# Altium PCB Si1153 Eval PCB1.PcbDoc
Units mm, origin at the board's own origin, x right, y up, seen from the top; angles counter-clockwise.
Board outline 42.5 x 12.8 mm, 2 copper layers (Top Layer, Bottom Layer); 18 components, 10 nets, 48 pads, 10 vias.
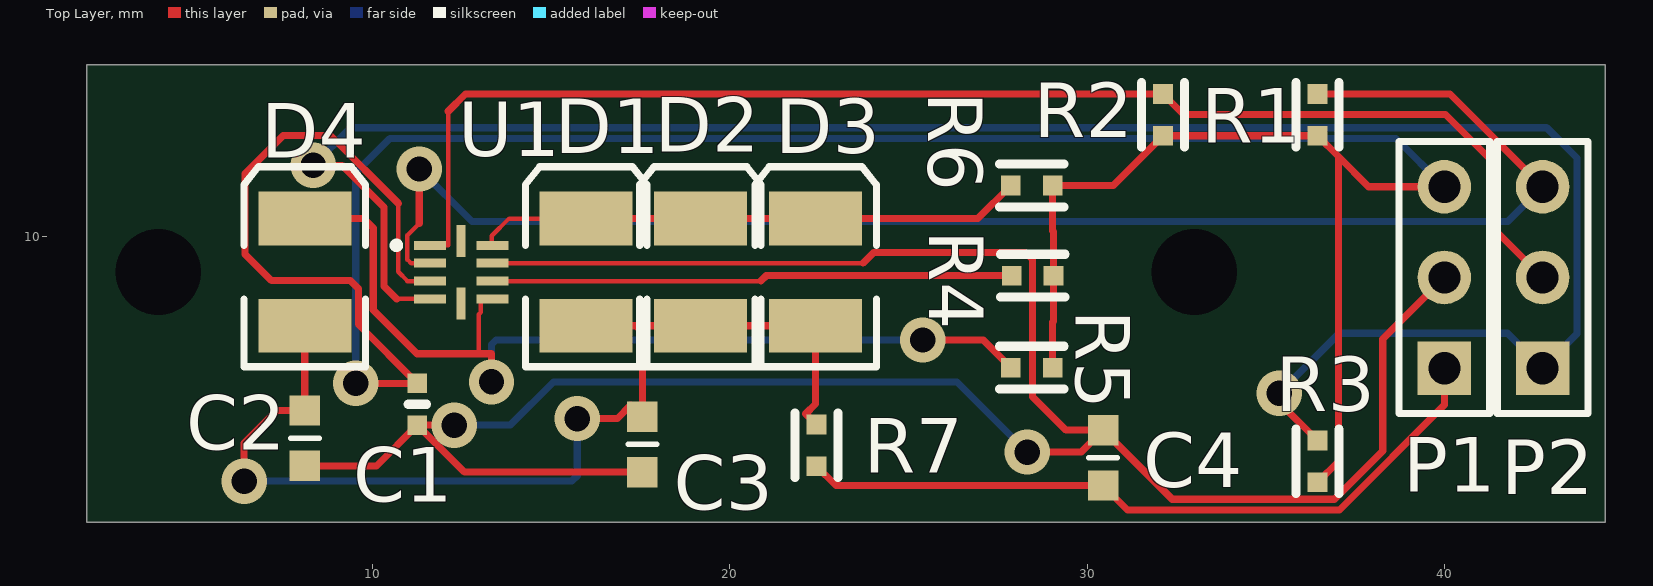
[diagram p0: Top Layer view]
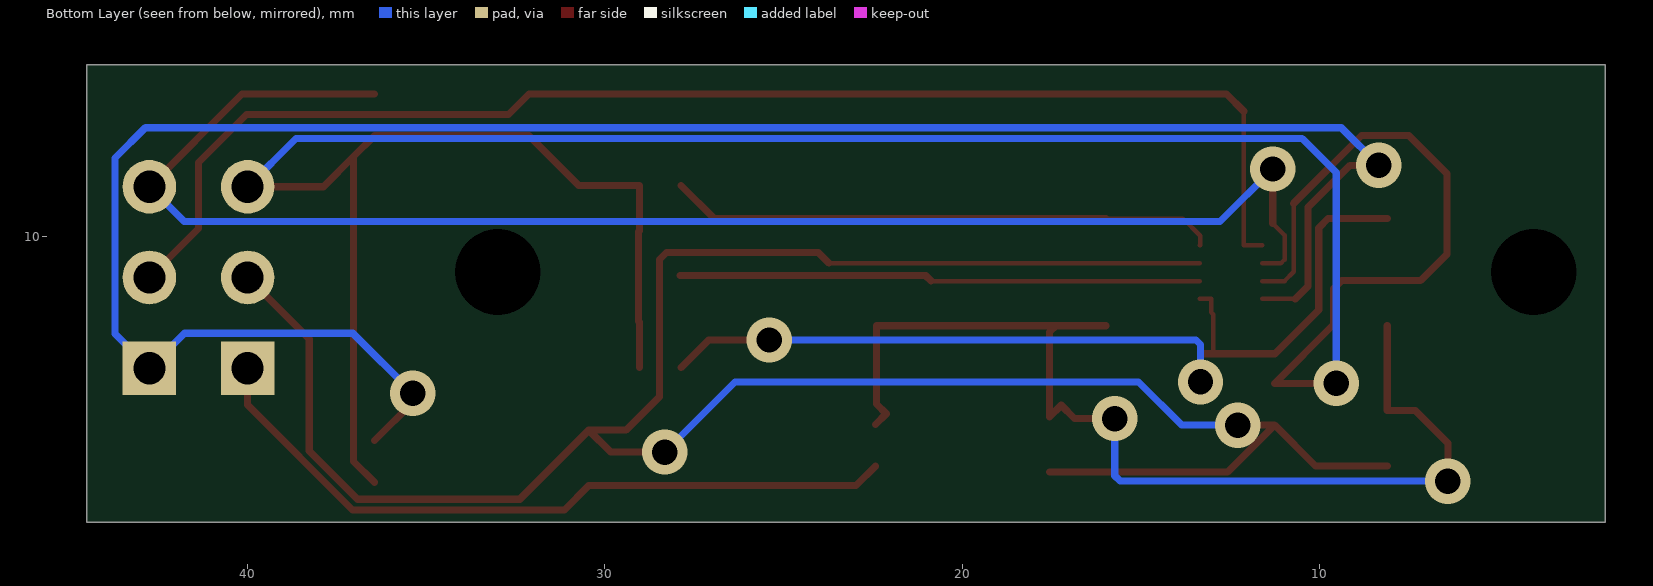
[diagram p1: Bottom Layer view, seen from below]
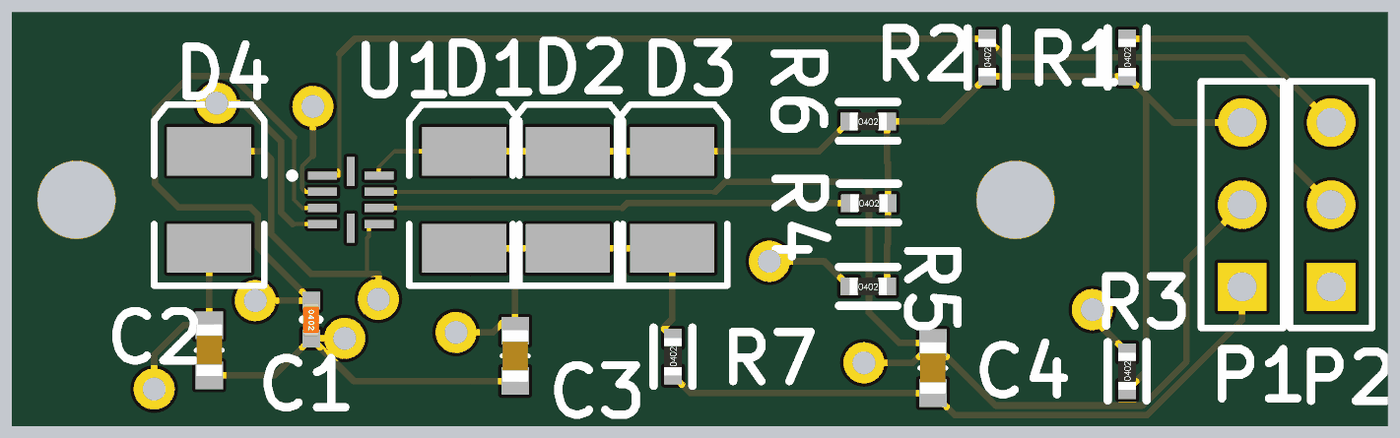
[diagram p2: 3D render of the assembled board from above, using the file's embedded part models]

## Layer stack, top to bottom
Top Solder: solder mask 0.0102, Solder Resist, Dk 3.5
Top Layer: signal copper 0.0356
Dielectric 1: dielectric 0.32, FR-4, Dk 4.8
Bottom Layer: signal copper 0.0356
Bottom Solder: solder mask 0.0102, Solder Resist, Dk 3.5

## Board outline
2,2 44.5,2 44.5,14.8 2,14.8

## Design rules (kind name [scope] priority, off if disabled: settings)
Clearance [All] p1: gap=0.1 ignorepadtopadclearanceinfootprint=FALSE except(0: Arc-Hole Track-Hole SMDPad-Hole THPad-Hole Via-Hole Fill-Hole Poly-Hole Region-Hole Text-Hole)
PolygonConnect [All] p1: connectstyle=Relief reliefconductorwidth=0.254 reliefentries=4 polygonreliefangle="90 Angle" airgapwidth=0.254
RoomDefinition Sheet1 [InComponentClass('Sheet1')] p1: confinementstyle=ConfineIn formatcopy=TRUE lockcomponents=FALSE outline 155.534,3.426 252.888,3.426 252.888,10.052 155.534,10.052
RoutingVias [All] p1: holewidth=0.711 width=1.27 viastyle="Through Hole" minholewidth=0.711 minwidth=1.27 maxholewidth=0.711 maxwidth=1.27
SMDNeckDown [All] p1: percent=50.000
SolderMaskExpansion [All] p1: expansion=0.102
Width [All] p1: maxlimit=0.254 minlimit=0.1 preferedwidth=0.2 minimp=50.000000 maximp=50.000000 favimp=50.000000
30 further rules are at their usual default settings.

## Classes and differential pairs
component class Sheet1: C1 C2 C3 C4 D2 D3 D4 P1 P2 R1 R2 R3 R4 R5 R6 R7 U1

## Components (designator, comment, footprint, x,y, rotation, side; value= is the part's Value field where it differs from the comment)
C1 "0.10µF" SMD-0402C 11.25,5.3 r180 top
C2 "47µF" SMD-0603C 8.1,4.35 r0 top
C3 "47µF" SMD-0603C 17.55,4.175 r0 top
C4 "47µF" SMD-0603C 30.45,3.8 r180 top
D1 "LED1" 3.5X2.8X1.9 15.975,9 r90 top
D2 "LED2" 3.5X2.8X1.9 19.175,9 r90 top
D3 "LED3" 3.5X2.8X1.9 22.4,9 r90 top
D4 "LED4" 3.5X2.8X1.9 8.1,9 r90 top
P1 "Header 3" HDR1X3 40,6.31 r90 top
P2 "Header 3" HDR1X3 42.75,6.31 r90 top
R1 "5.1k" SMD-0402-RES 36.45,13.4 r0 top
R2 "5.1k" SMD-0402-RES 32.125,13.4 r0 top
R3 "5.1k" SMD-0402-RES 36.45,3.7 r0 top
R4 "47k" SMD-0402-RES 28.475,8.9 r270 top
R5 "47k" SMD-0402-RES 28.45,6.325 r270 top
R6 "47k" SMD-0402-RES 28.45,11.425 r270 top
R7 "22" SMD-0402-RES 22.425,4.15 r0 top
U1 "Si1153-A10-DFN-10" SLAB-QFN-10_V 12.475,9 r0 top

## Footprints (in the part's own frame and the unit in brackets; to place one, negate y for a bottom-side part, rotate by r counter-clockwise, add the part's x,y. Pads: shape width x height; smd on the part's side, far side on the other; paste and mask are expansions set on the pad)
3.5X2.8X1.9 [mm] "SM LED; 2 C-Bend Leads; Body 3.5 x 2.8 x 1.9 mm, inc leads (LxWxH typ)"
  rect 1.5x2.6 smd: 1(-1.5,0) 2(1.5,0)
  silkscreen extent -2.65,-1.7 2.95,1.7
HDR1X3 [mm] "Connector; Header; 3 Position"
  rect 1.5x1.5 hole 0.9: 1(0,0)
  round 1.5 hole 0.9: 2(2.54,0) 3(5.08,0)
  silkscreen extent -1.27,-1.27 6.35,1.27
SLAB-QFN-10_V [mm] "QFN, 10-Leads, Body 2x2mm, Pitch 0.5mm"
  rect 0.9x0.25 smd: 1(-0.875,0.75) 2(-0.875,0.25) 3(-0.875,-0.25) 4(-0.875,-0.75) 6(0.875,-0.75) 7(0.875,-0.25) 8(0.875,0.25) 9(0.875,0.75)
  rect 0.25x0.9 smd: 5(0,-0.875) 10(0,0.875)
  silkscreen extent -1.87,0.69 -1.75,0.81, body extent -1,-1 1,1, height 0.8
SMD-0402-RES [mm]
  rect 0.55x0.55 smd: 1(0,0.584) 2(0,-0.584)
  silkscreen extent -0.6,-0.9 0.6,0.9, body extent -0.28,-0.57 0.27,0.58, height 0.41
SMD-0402C [mm]
  rect 0.55x0.55 smd: 1(0,0.584) 2(0,-0.584)
  silkscreen extent -0.25,0 0.25,0, body extent -0.25,-0.51 0.25,0.51, height 0.51
SMD-0603C [mm]
  rect 0.85x0.85 smd: 1(0,0.775) 2(0,-0.775)
  silkscreen extent -0.4,0 0.4,0, body extent -0.4,-0.8 0.4,0.8, height 0.9

## Part data
C1: library part GCM155R71C104KA55D, "CAP CER 0.1UF 16V X7R 0402", Digi-Key Part Number=490-4759-1-ND, Manufacturer="Murata Electronics North America", Operating Temperature="-55°C ~ 125°C", Package / Case="0402 (1005 Metric)", Ratings=AEC-Q200, Temperature Coefficient=X7R, Tolerance=±10%, Voltage=16V, @ qty=0, Applications=Automotive, Datasheets=http://www.murata.com/~/media/webrenewal/support/library/catalog/products/capacitor/mlcc/c03e.ashx, Factory Stock=0, Features=-, Height - Seated (Max)=-, Image=//media.digikey.com/Renders/Murata%20Renders/ZRB-SERIES-0402.jpg, Lead Spacing=-, Lead Style=-, Minimum Quantity=1, Mounting Type="Surface Mount, MLCC", Packaging="Cut Tape (CT)", Part Number=GCM155R71C104KA55D, Part Status=Active, Quantity Available=734194, Series=GCM, Size / Dimension="0.039\" L x 0.020\" W (1.00mm x 0.50mm)", Thickness (Max)="0.022\" (0.55mm)", Unit Price (USD)=0.1
C2 C3 C4: library part ZRB18AR60J476ME01L, "CAP CER 47UF 6.3V X5R 0603", Digi-Key Part Number=490-13255-1-ND, Manufacturer="Murata Electronics North America", Operating Temperature="-55°C ~ 85°C", Package / Case="0603 (1608 Metric)", Ratings=-, Temperature Coefficient=X5R, Tolerance=±20%, Voltage=6.3V, @ qty=0, Applications="Acoustic Noise Reduction", Datasheets=http://psearch.en.murata.com/capacitor/product/ZRB18AR60J476ME01%23.pdf, Factory Stock=0, Features="Derating Recommended, Interposer Termination", Height - Seated (Max)=-, Image=//media.digikey.com/Renders/Murata%20Renders/ZRB-SERIES-0603.jpg, Lead Spacing=-, Lead Style=-, Minimum Quantity=1, Mounting Type="Surface Mount, MLCC", Packaging="Cut Tape (CT)", Part Number=ZRB18AR60J476ME01L, Part Status=Active, Quantity Available=4130, Series=ZRB, Size / Dimension="0.063\" L x 0.031\" W (1.60mm x 0.80mm)", Thickness (Max)="0.047\" (1.20mm)", Unit Price (USD)=0.62
D1 D2 D4: library part LED3, "Typical BLUE SiC LED", DatasheetVersion=16-Apr-2002, LatestRevisionDate=17-Dec-2003, LatestRevisionNote="PCB Footprint replaced.", PackageDescription="SM LED; 2 C-Bend Leads; Body 3.5 x 2.8 x 1.9 mm, inc leads (LxWxH typ)", PackageReference=3.5X2.8X1.9, PackageVersion=16-Apr-2002, Published=8-Jun-2000, Publisher="Altium Limited"
D3: "Typical BLUE SiC LED", DatasheetVersion=16-Apr-2002, LatestRevisionDate=17-Dec-2003, LatestRevisionNote="PCB Footprint replaced.", PackageDescription="SM LED; 2 C-Bend Leads; Body 3.5 x 2.8 x 1.9 mm, inc leads (LxWxH typ)", PackageReference=3.5X2.8X1.9, PackageVersion=16-Apr-2002, Published=8-Jun-2000, Publisher="Altium Limited"
P1 P2: "Header, 3-Pin", LatestRevisionDate=17-Jul-2002, LatestRevisionNote="Re-released for DXP Platform.", Publisher="Altium Limited"
R1 R2 R3: library part ERJ-2GEJ512X, "RES SMD 5.1K OHM 5% 1/10W 0402", Digi-Key Part Number=P5.1KJCT-ND, Manufacturer="Panasonic Electronic Components", Operating Temperature="-55°C ~ 155°C", Package / Case="0402 (1005 Metric)", Power (Watts)="0.1W, 1/10W", Supplier Device Package=0402, Temperature Coefficient=±200ppm/°C, Tolerance=±5%, @ qty=1500, Composition="Thick Film", Datasheets=http://industrial.panasonic.com/www-cgi/jvcr13pz.cgi?E+PZ+3+AOA0001+ERJ2GEJ512X+7+WW, Factory Stock=0, Failure Rate=-, Features="Automotive AEC-Q200", Height - Seated (Max)="0.016\" (0.40mm)", Image=//media.digikey.com/Photos/Panasonic%20Photos/ERJ-PA2-Series.jpg, Minimum Quantity=1, Number of Terminations=2, Packaging="Cut Tape (CT)", Part Number=ERJ-2GEJ512X, Part Status=Active, Quantity Available=153265, Series=ERJ, Size / Dimension="0.039\" L x 0.020\" W (1.00mm x 0.50mm)", Unit Price (USD)=0.00350
R4 R5 R6: library part ERJ-2GEJ473X, "RES SMD 47K OHM 5% 1/10W 0402", Digi-Key Part Number=P47KJCT-ND, Manufacturer="Panasonic Electronic Components", Operating Temperature="-55°C ~ 155°C", Package / Case="0402 (1005 Metric)", Power (Watts)="0.1W, 1/10W", Supplier Device Package=0402, Temperature Coefficient=±200ppm/°C, Tolerance=±5%, @ qty=1500, Composition="Thick Film", Datasheets=http://industrial.panasonic.com/www-cgi/jvcr13pz.cgi?E+PZ+3+AOA0001+ERJ2GEJ473X+7+WW, Factory Stock=0, Failure Rate=-, Features="Automotive AEC-Q200", Height - Seated (Max)="0.016\" (0.40mm)", Image=//media.digikey.com/Photos/Panasonic%20Photos/ERJ-PA2-Series.jpg, Minimum Quantity=1, Number of Terminations=2, Packaging="Cut Tape (CT)", Part Number=ERJ-2GEJ473X, Part Status=Active, Quantity Available=5182645, Series=ERJ, Size / Dimension="0.039\" L x 0.020\" W (1.00mm x 0.50mm)", Unit Price (USD)=0.00350
R7: library part ERJ-2GEJ220X, "RES SMD 22 OHM 5% 1/10W 0402", Digi-Key Part Number=P22JCT-ND, Manufacturer="Panasonic Electronic Components", Operating Temperature="-55°C ~ 155°C", Package / Case="0402 (1005 Metric)", Power (Watts)="0.1W, 1/10W", Supplier Device Package=0402, Temperature Coefficient=±200ppm/°C, Tolerance=±5%, @ qty=1500, Composition="Thick Film", Datasheets=http://industrial.panasonic.com/www-cgi/jvcr13pz.cgi?E+PZ+3+AOA0001+ERJ2GEJ220X+7+WW, Factory Stock=0, Failure Rate=-, Features="Automotive AEC-Q200", Height - Seated (Max)="0.016\" (0.40mm)", Image=//media.digikey.com/Photos/Panasonic%20Photos/ERJ-PA2-Series.jpg, Minimum Quantity=1, Number of Terminations=2, Packaging="Cut Tape (CT)", Part Number=ERJ-2GEJ220X, Part Status=Active, Quantity Available=1147502, Series=ERJ, Size / Dimension="0.039\" L x 0.020\" W (1.00mm x 0.50mm)", Unit Price (USD)=0.00350
U1: library part Si1143-A10-GMR, "Proximity / Ambient Light Sensor IC with I2C Interface, 3 LED Drivers, -40 to 85 degC, 10-pin QFN, Tape and Reel", Manufacturer="Silicon Labs", Supplier Part Number 1=336-1970-2-ND, Ambient Light Sensor=TRUE, Code_IPC=J-STD-020, Code_JEDEC=MO-220, ComponentLink1Description="Manufacturer URL", ComponentLink1URL=http://www.silabs.com, ComponentLink2Description=Datasheet, ComponentLink2URL=http://www.silabs.com/Support%20Documents/TechnicalDocs/Si114x.pdf, ComponentLink3Description="Package Specification", ComponentLink3URL=http://www.silabs.com/Support%20Documents/TechnicalDocs/Si114x.pdf, DatasheetVersion="Rev. 1.3", Mounting Technology="Surface Mount", Output Type=I2C, PackageDescription="10-Pin Quad-Flat No-Leads Package, Body 2 x 2 mm, Pitch 0.5 mm", PackageReference=QFN-10, Packing="Tape and Reel", PartNumber=Si1143-A10-GMR, Sub-Family="Optical Sensors", Supplier 1=Digi-Key, Supplier 2=Digi-Key, Supplier 3=Digi-Key, Supplier 4=Mouser, Supplier Part Number 2=336-1970-1-ND, Supplier Part Number 3=336-1970-6-ND, Supplier Part Number 4=634-SI1143-A10-GMR

## Free pads (board coordinates)
  round 1.524 hole 2.4: 2(4,9) 3(33,9)

## Via types
v1: diameter 1.27, hole 0.711, Top Layer to Bottom Layer, 10 vias

## Nets (pads, with @x,y where several pads share a name; then routed paths per layer and width w, separated by ;. In a path a pad name is that pad's centre, name@x,y a point inside that pad or via, vN(x,y) a via of type N, cw(c..) or ccw(c..) an arc to the next point about the centre after c; other vN are vias at no path point)
GND: C1.1 C2.2 C3.2 C4.2 P1.2 U1.8 | length 67.5
  Top Layer w0.125: U1.8 23.725,9.25
  Top Layer w0.2: C2.2 10.109,3.575 C1.1 ; v1(12.285,4.716) C1.1 ; C3.2 12.566,3.4 C1.1 ; 23.725,9.25 24.025,9.55 28.275,9.55 28.475,9.35 28.475,5.51 29.41,4.575 C4.2 ; v1(28.321,3.962) 29.837,3.962 C4.2 ; P1.2 38.278,7.128 38.278,3.994 36.925,2.641 32.384,2.641 C4.2
  Bottom Layer w0.2: v1(12.285,4.716) 13.85,4.716 15.059,5.925 26.358,5.925 v1(28.321,3.962)
LED_PWR: C4.1 P1.1 R7.2 | length 20.3
  Top Layer w0.2: R7.2 22.966,3.025 C4.1 31.134,2.341 37.063,2.341 40,5.278 P1.1
NetC2_1: C2.1 C3.1 D1.1 D2.1 D3.1 D4.1 R7.1 | length 30.7
  Top Layer w0.2: v1(6.4,3.15) 6.4,4.21 7.315,5.125 C2.1 D4.1 ; v1(15.725,4.9) 16.85,4.9 17.225,5.275 C3.1 17.55,7.324 17.374,7.5 ; D1.1 17.374,7.5 ; R7.1 22.125,5.034 22.4,5.309 D3.1 D2.1 17.374,7.5
  Bottom Layer w0.2: v1(6.4,3.15) 15.575,3.15 15.725,3.3 v1(15.725,4.9) v1@15.725,4.934
NetD1_2: D1.2 D2.2 D3.2 R6.2 U1.9 | length 15.4
  Top Layer w0.125: U1.9 13.335,9.75 13.335,10.017 13.818,10.5 D1.2
  Top Layer w0.2: D1.2 D2.2 D3.2 26.941,10.5 R6.2
NetD4_2: D4.2 R5.2 U1.6 | length 26.8
  Top Layer w0.125: 12.975,6.716 12.975,7.819 13.03,7.874 13.03,8.25 U1.6
  Top Layer w0.2: D4.2 9.754,10.5 10.017,10.237 10.017,7.941 11.242,6.716 12.975,6.716 13.325,6.716 v1(13.325,5.925) ; v1(25.4,7.1) 27.091,7.1 R5.2
  Bottom Layer w0.2: v1(13.325,5.925) 13.325,6.975 13.45,7.1 v1(25.4,7.1)
NetP2_1: P2.1 R3.1 U1.4 | length 58.8
  Top Layer w0.125: 10.673,8.25 U1.4
  Top Layer w0.2: v1(8.331,11.989) 9.144,11.989 10.317,10.816 10.317,8.606 10.673,8.25 ; v1(35.375,5.606) 35.375,5.359 R3.1
  Bottom Layer w0.2: v1(8.331,11.989) 9.383,13.041 42.865,13.041 43.713,12.192 43.713,7.273 P2.1 41.77,7.29 37.059,7.29 v1(35.375,5.606)
NetP2_2: P2.2 R2.1 U1.1 | length 38.3
  Top Layer w0.125: U1.1 12.116,9.75 12.116,13.502
  Top Layer w0.2: 12.116,13.502 12.598,13.984 R2.1 32.698,13.411 40.03,13.411 41.377,12.065 41.377,10.223 P2.2
NetP2_3: P2.3 R1.1 U1.2 | length 43.2
  Top Layer w0.125: 11.303,10.363 10.973,10.033 10.973,9.352 11.074,9.25 U1.2
  Top Layer w0.2: 11.303,10.363 v1(11.303,11.887) ; R1.1 40.156,13.984 P2.3
  Bottom Layer w0.2: v1(11.303,11.887) 12.776,10.414 41.774,10.414 P2.3
NetR4_2: R4.2 U1.7 | length 14.6
  Top Layer w0.125: U1.7 20.866,8.75
  Top Layer w0.2: 20.866,8.75 21.016,8.9 R4.2
VDD: C1.2 P1.3 R1.2 R2.2 R3.2 R4.1 R5.1 R6.1 U1.3 | length 83.3
  Top Layer w0.125: 10.716,10.925 10.716,9.007 10.973,8.75 U1.3
  Top Layer w0.2: v1(9.525,5.884) C1.2 9.601,7.533 9.601,8.534 9.373,8.763 7.163,8.763 6.425,9.501 6.425,11.753 7.496,12.824 8.817,12.824 10.716,10.925 ; R5.1 29.034,7.595 29.059,7.62 R4.1 29.059,10.135 29.034,10.16 R6.1 30.734,11.425 R2.2 R1.2 37.033,12.233 ; R3.2 37.033,3.699 37.033,12.233 ; P1.3 37.876,11.39 37.033,12.233
  Bottom Layer w0.2: v1(9.525,5.884) 9.525,11.786 10.48,12.741 38.649,12.741 P1.3
pads on no net: U1.5 U1.10

## Silkscreen, mask and mechanical layers (free items; w line width, h text height)
Mechanical 15:
  lines w0.254: 44.5,1.975 2.05,1.975 2.025,2 2.025,14.8 44.5,14.8 ; 44.5,2 44.525,2.025 44.525,5.225 44.525,11.625 44.525,14.825